# Altium PCB smartmcuPCB.PcbDoc
Units mil, origin at the board's own origin, x right, y up, seen from the top; angles counter-clockwise.
Board outline 2008 x 1900 mil, 4 copper layers (Top Layer, GND_Layer, 3.3V_Layer, Bottom Layer), stack 23.756 mil thick; 89 components, 43 nets, 257 pads, 106 vias.
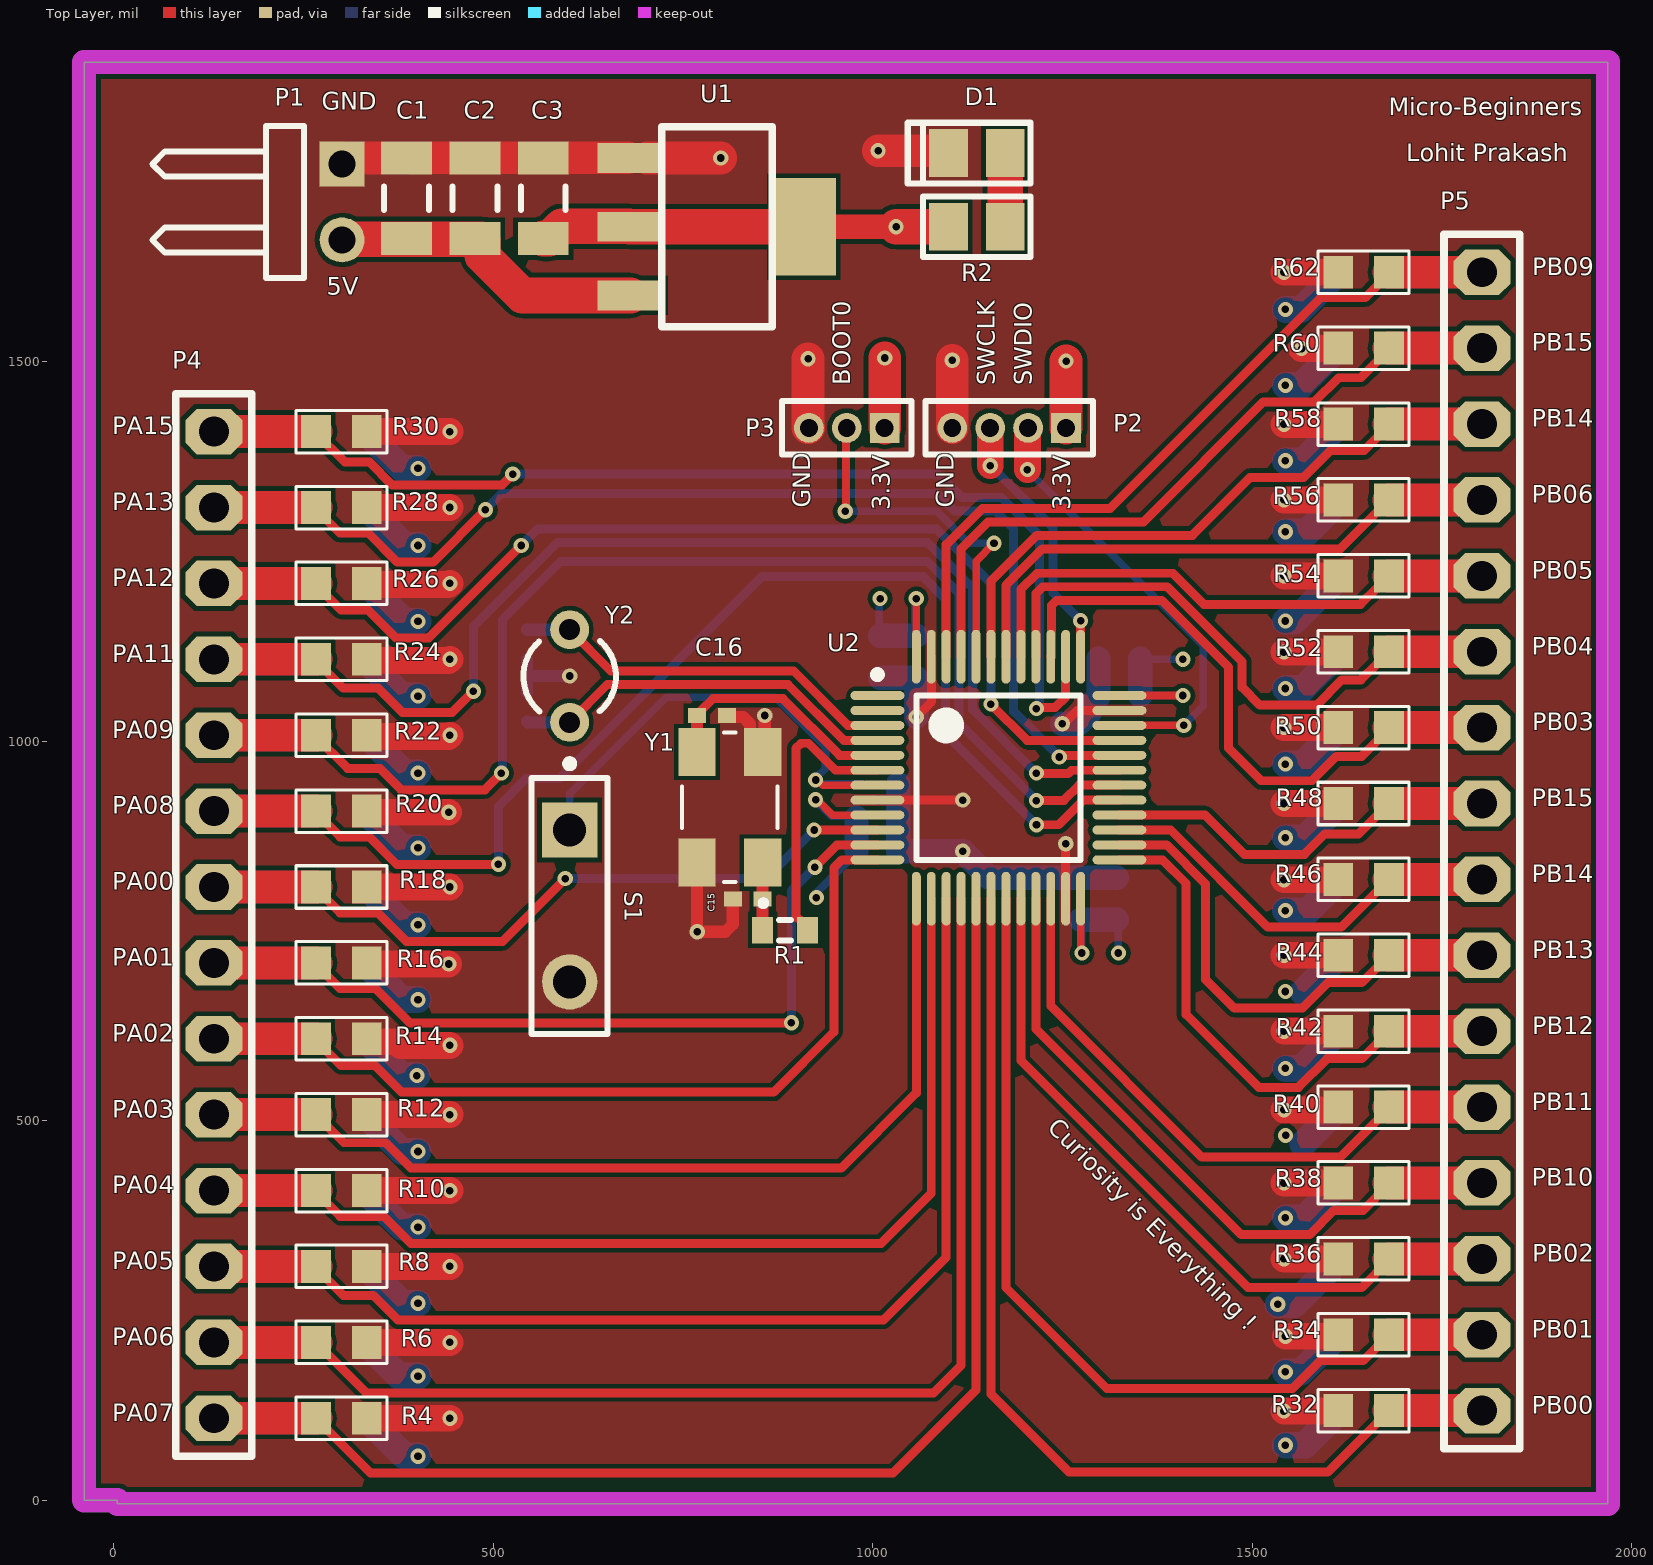
[diagram p0: Top Layer view]
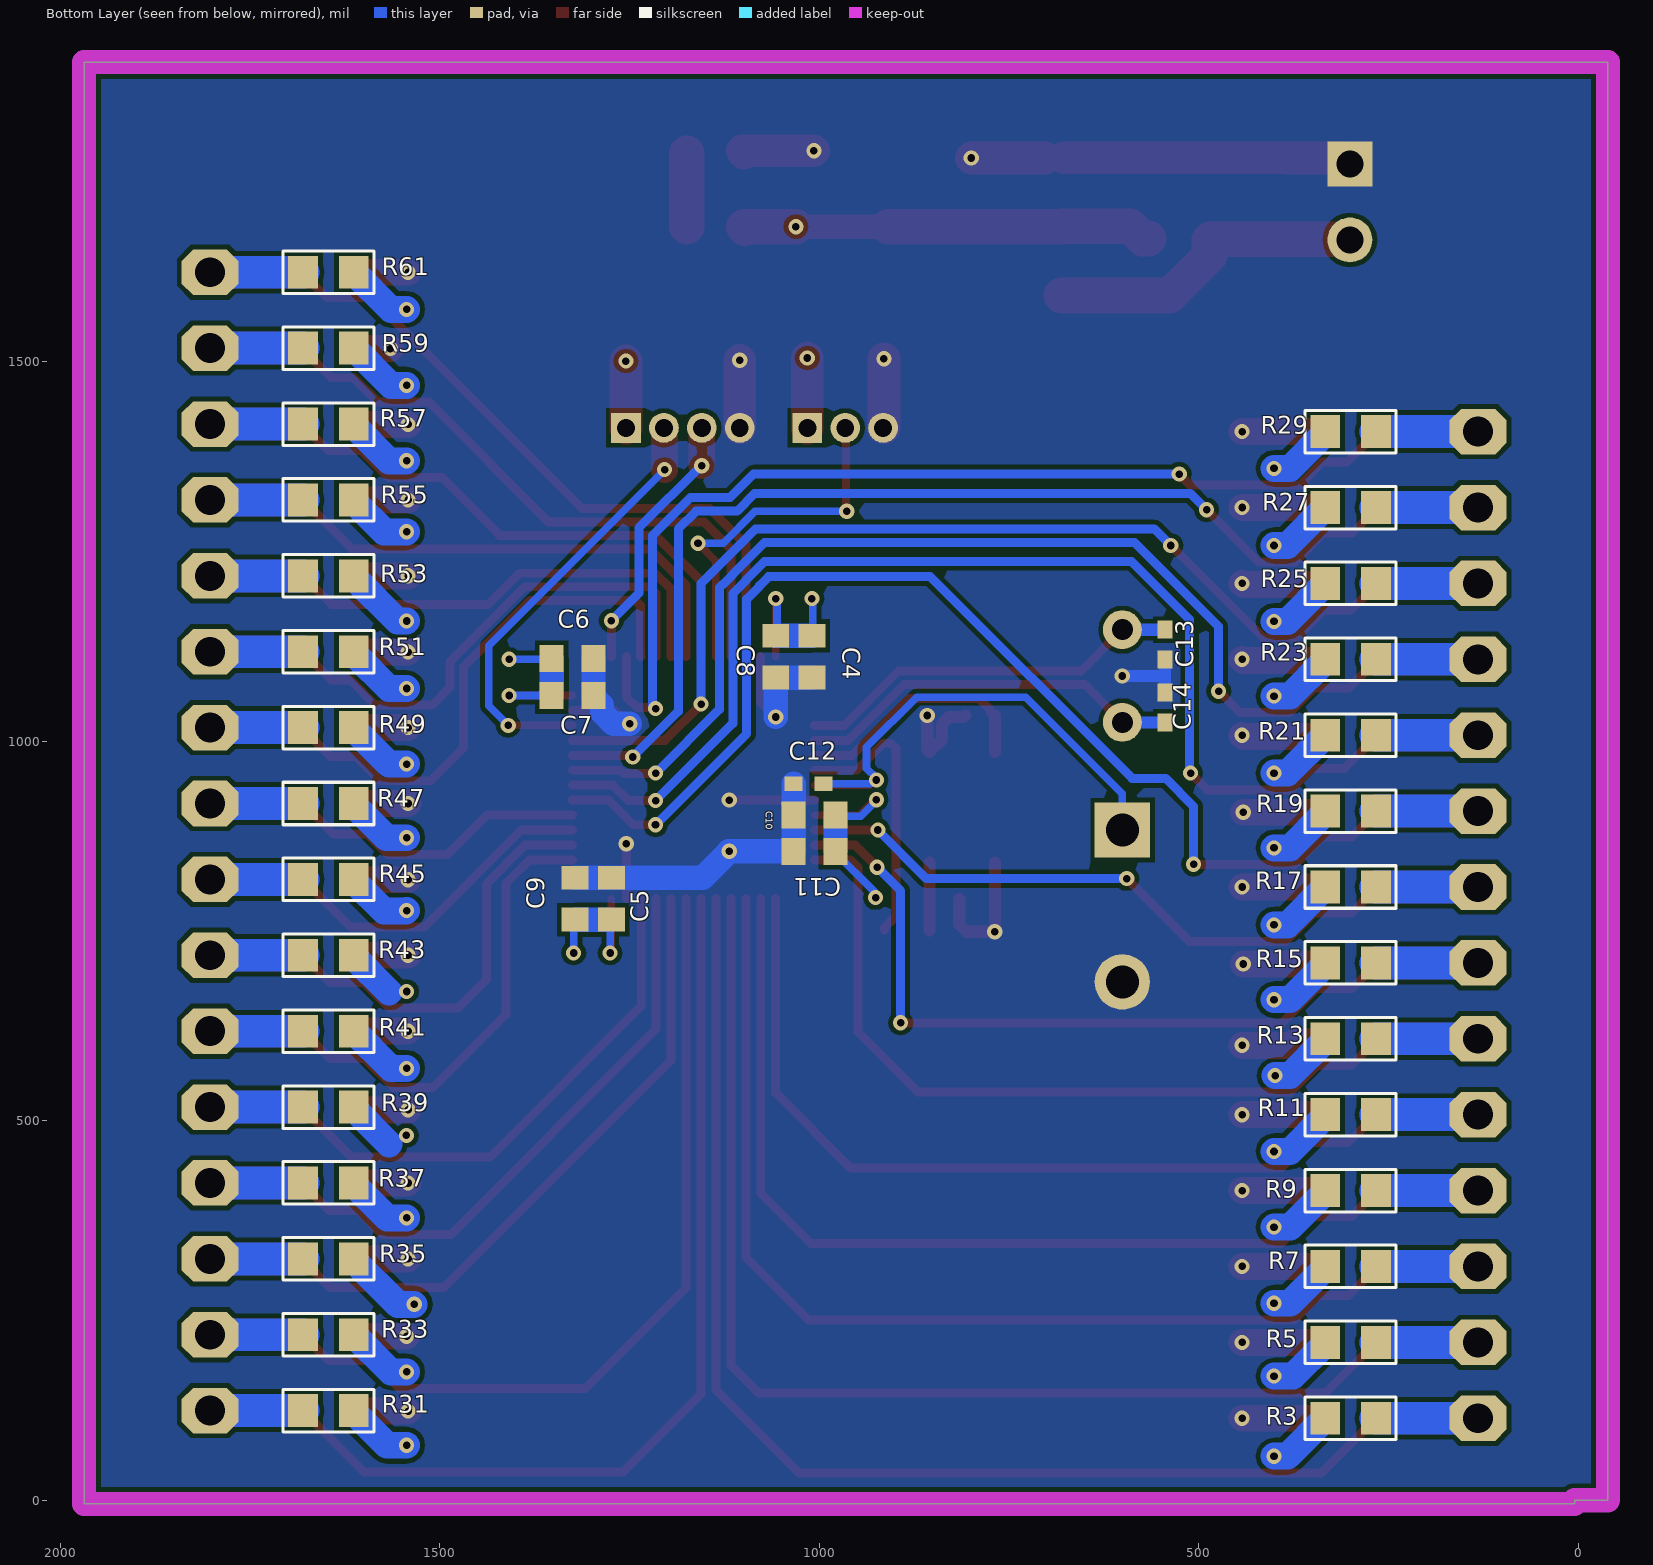
[diagram p1: Bottom Layer view, seen from below]
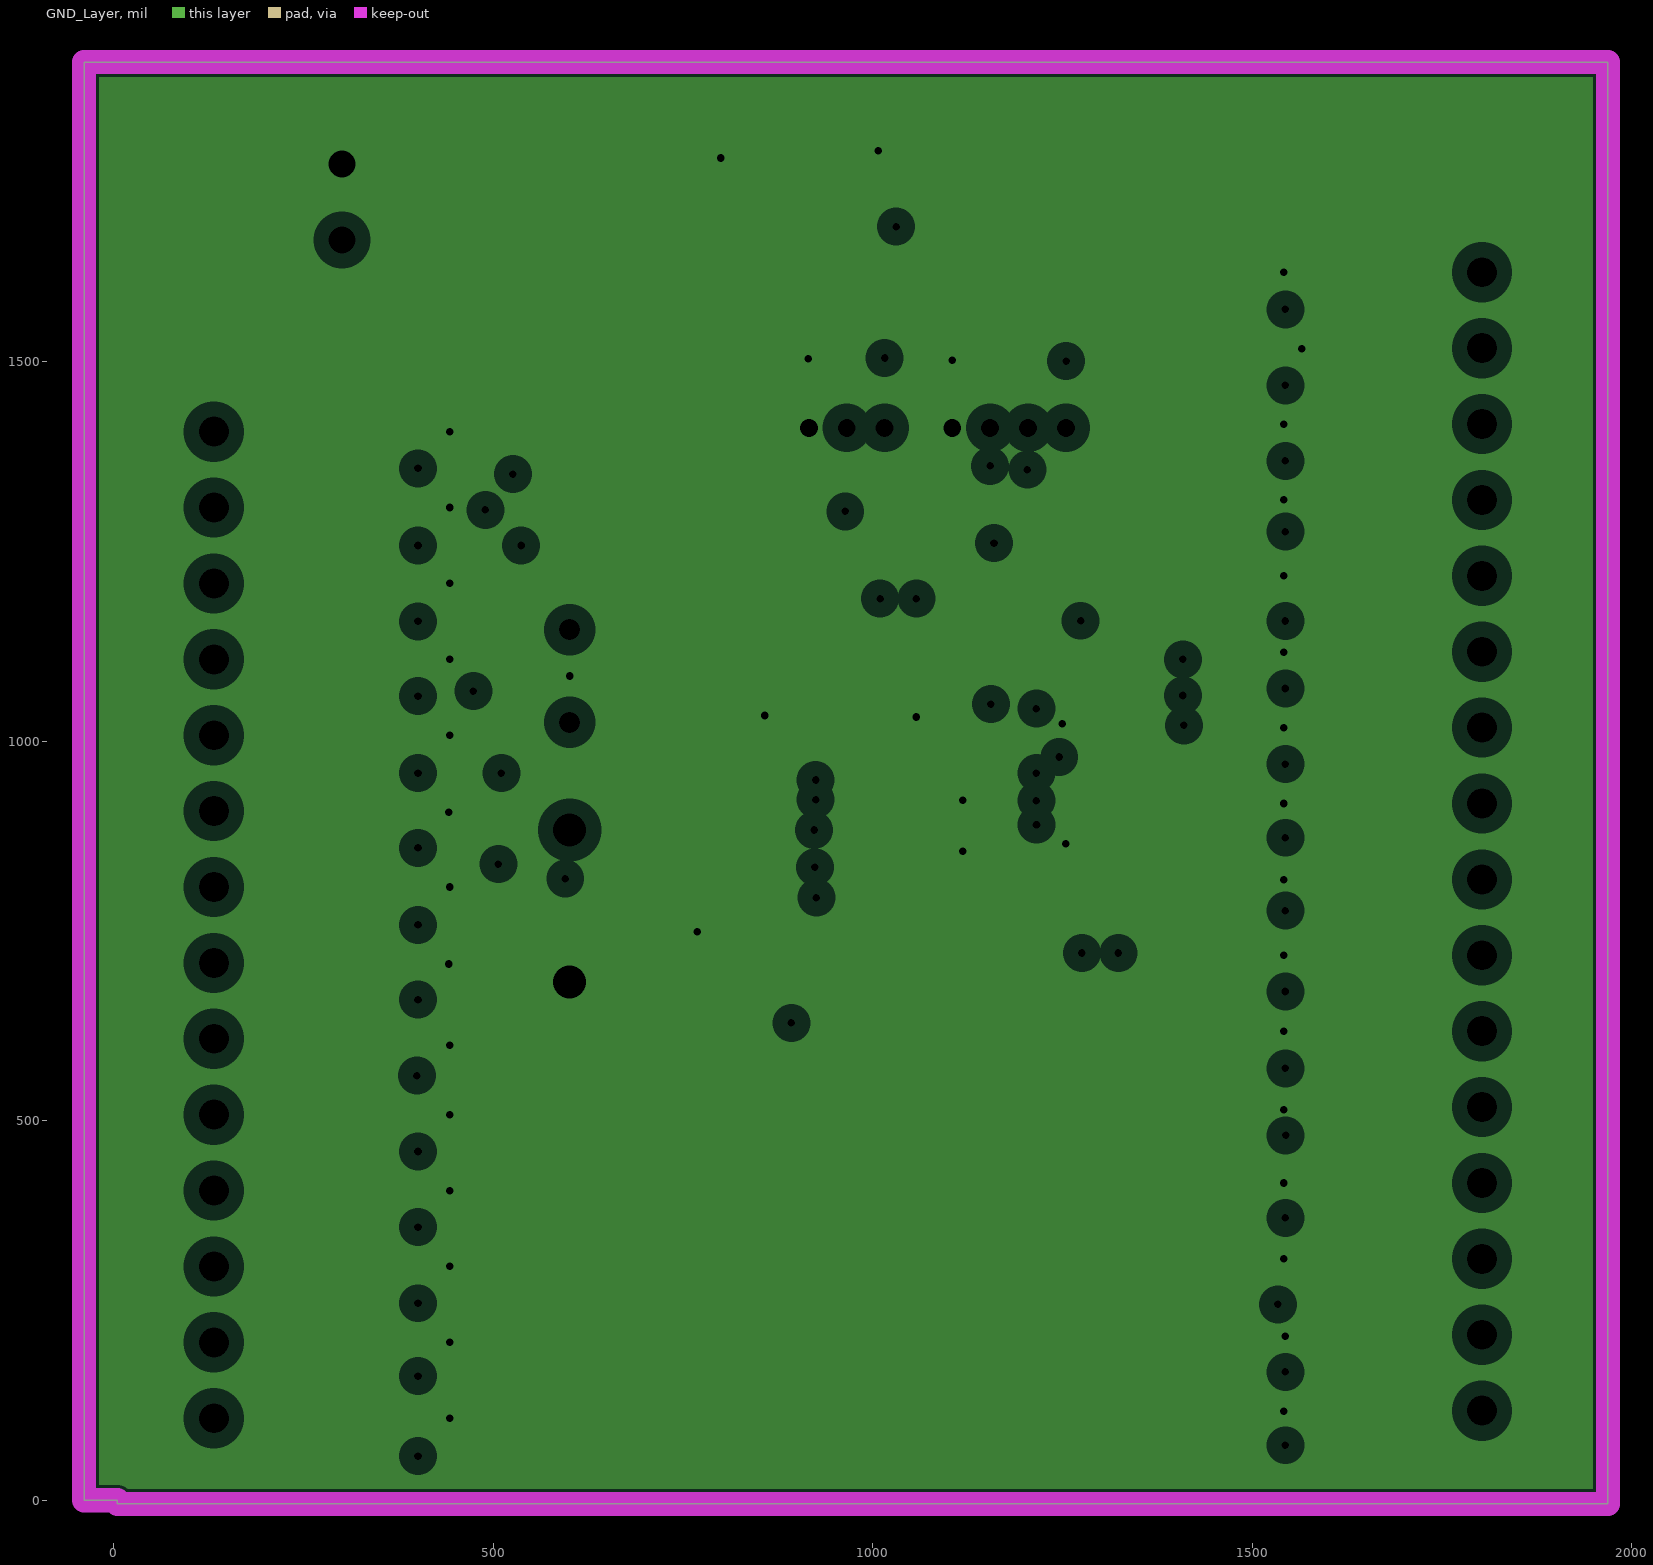
[diagram p2: GND_Layer, clearances drawn from the general rule]
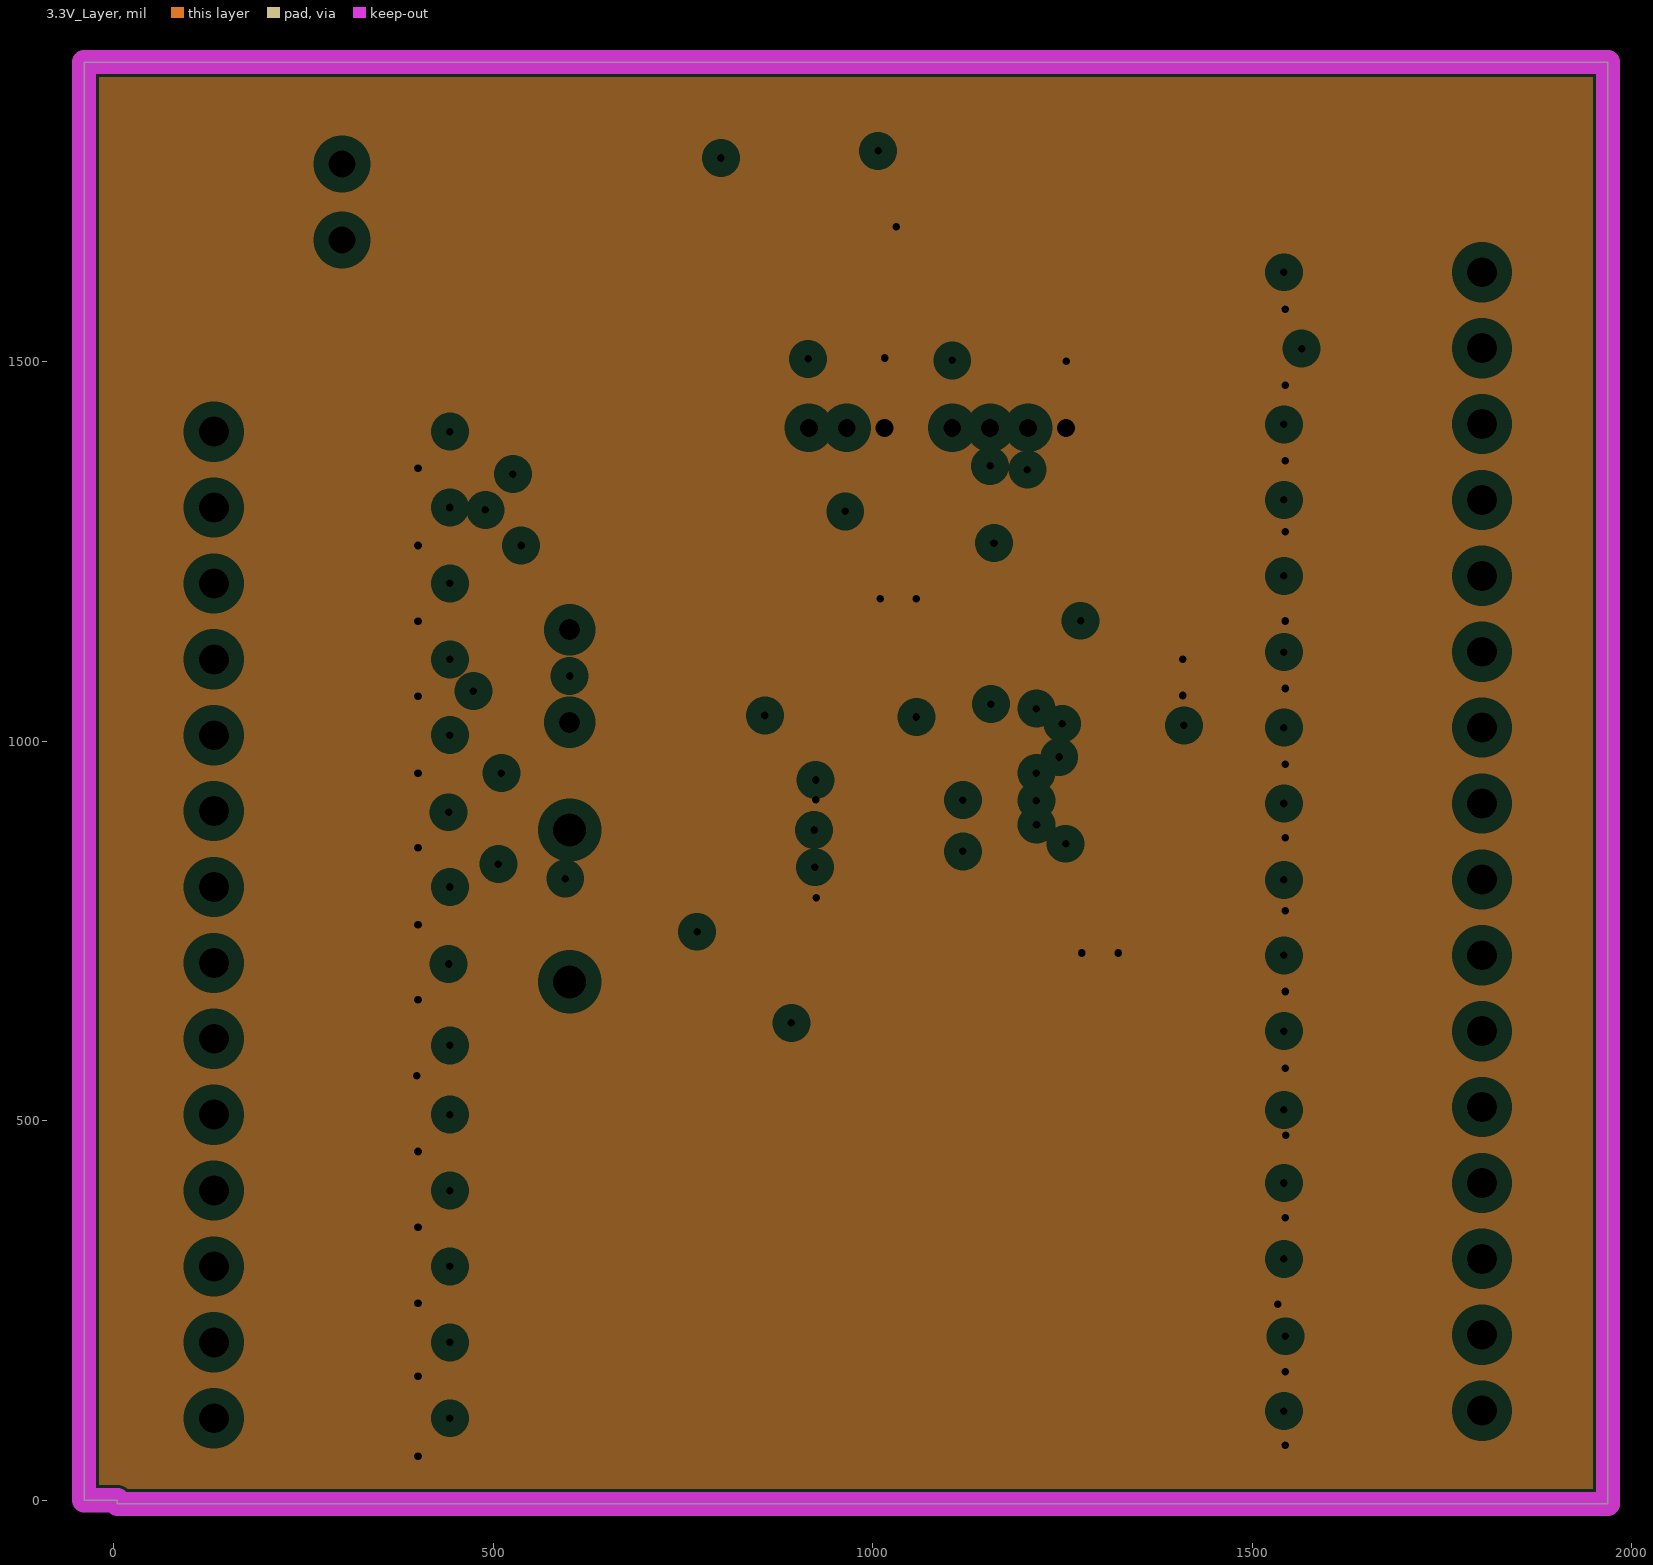
[diagram p3: 3.3V_Layer, clearances drawn from the general rule]
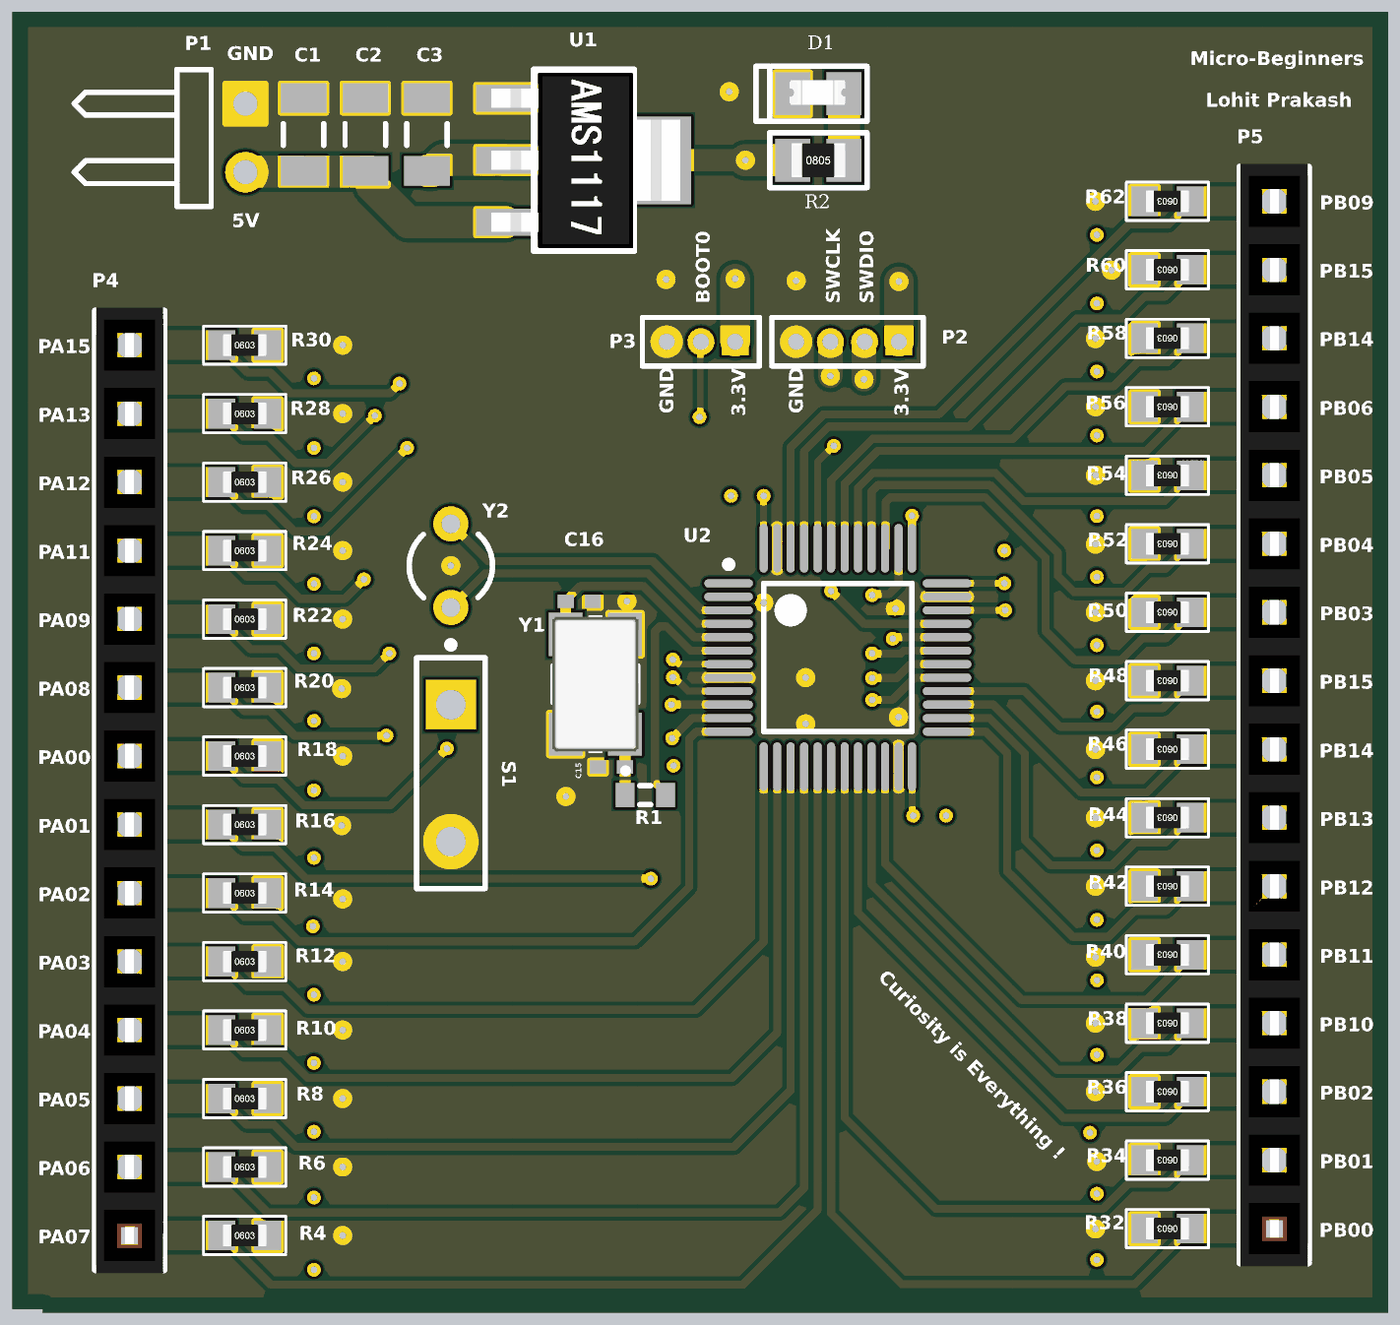
[diagram p4: 3D render of the assembled board from above, using the file's embedded part models]
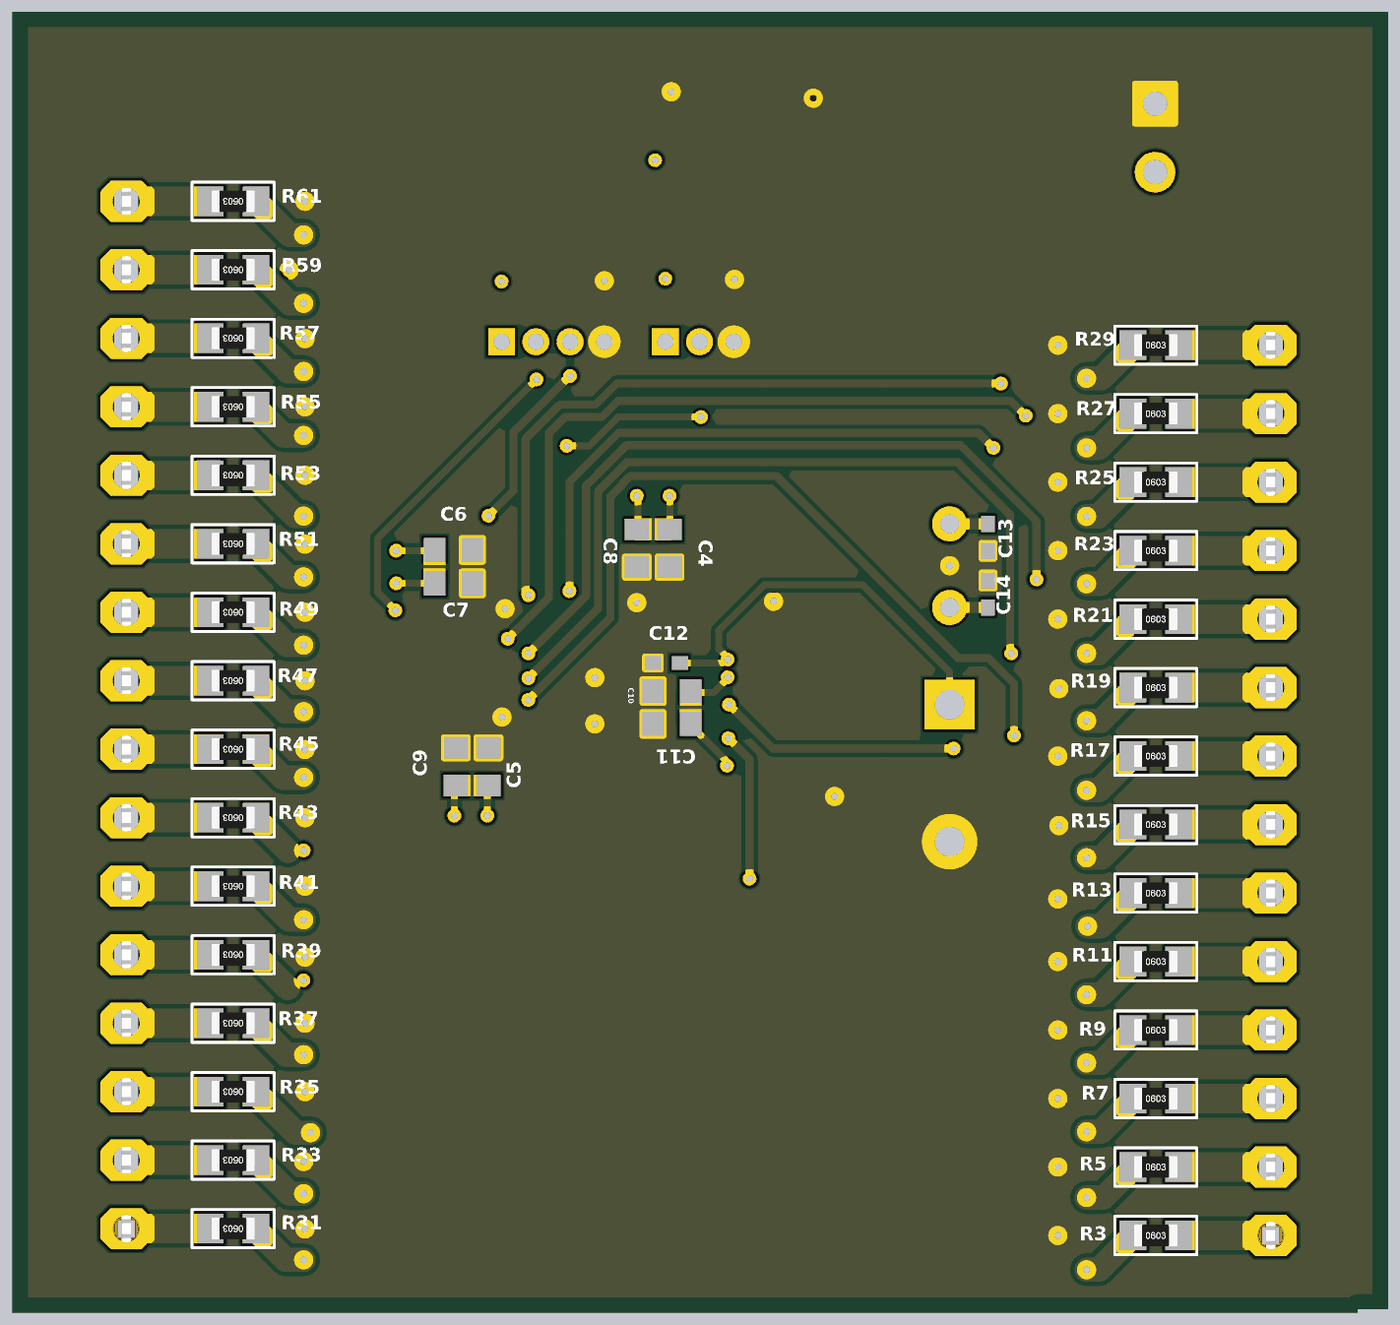
[diagram p5: 3D render of the assembled board from below, using the file's embedded part models]

## Layer stack, top to bottom
Top Solder: solder mask 0.4, Solder Resist, Dk 3.5
Top Layer: signal copper 1.4
Dielectric 2: prepreg 2.8, PP-006, Dk 4.1
GND_Layer: plane copper 1.378, net GND
Dielectric 1: dielectric 12.6, FR-4, Dk 4.8
3.3V_Layer: plane copper 1.378, net +3.3V
Dielectric 3: prepreg 2.8, PP-006, Dk 4.1
Bottom Layer: signal copper 1.4
Bottom Solder: solder mask 0.4, Solder Resist, Dk 3.5

## Board outline
-39,0 -39,1895 1969,1895 1969,-5 5,-5 5,0

## Design rules (kind name [scope] priority, off if disabled: settings)
Clearance [All] p1: gap=6 ignorepadtopadclearanceinfootprint=FALSE
MinimumSolderMaskSliver [All] p1: minsoldermaskwidth=4
PlaneClearance [All] p1: clearance=20
PlaneConnect [All] p1: planeconnectstyle=Direct reliefexpansion=20 reliefentries=4 reliefconductorwidth=10 reliefairgap=10
PolygonConnect [All] p1: connectstyle=Direct reliefconductorwidth=10 reliefentries=4 polygonreliefangle="90 Angle" airgapwidth=10
RoutingVias [All] p1: holewidth=10 width=20 viastyle="Through Hole" minholewidth=10 minwidth=20 maxholewidth=28 maxwidth=50
SilkToSolderMaskClearance [IsPad] p1: minsilkscreentomaskgap=4 clearancetoexposedcopper=TRUE
SolderMaskExpansion [All] p1: expansion=4 istentingtop=FALSE
SupplyNets "Schematic Supply Nets_2" [InNet('+3.3V')] p1: voltage=0.000
SupplyNets "Schematic Supply Nets_1" [InNet('+5V')] p2: voltage=0.000
SupplyNets "Schematic Supply Nets" [InNet('GND')] p3: voltage=0.000
Width [All] p1: maxlimit=47 minlimit=10 preferedwidth=10
26 further rules are at their usual default settings.

## Classes and differential pairs
component class MCU: C4 C5 C6 C7 C8 C9 C10 C11 C12 C13 C14 C15 C16 P2 P3 P4 P5 R1 R3 R4 R5 R6 R7 R8 R9 R10 R11 R12 R13 R14 R15 R16 R17 R18 R19 R20 R21 R22 R23 R24 R25 R26 R27 R28 R29 R30 R31 R32 R33 R34 R35 R36 R37 R38 R39 R40 R41 R42 R43 R44 R45 R46 R47 R48 R49 R50 R51 R52 R53 R54 R55 R56 R57 R58 R59 R60 R61 R62 S1 U2 Y1 Y2
component class PowerSuppy: C1 C2 C3 D1 P1 R2 U1

## Components (designator, comment, footprint, x,y, rotation, side; value= is the part's Value field where it differs from the comment)
C1 "Cap Semi" C1206 385.8,1715.56 r270 top value=100nF
C2 "Cap Semi" C1206 476,1715.56 r270 top value=10uF
C3 "Cap Semi" C1206 566,1715.56 r270 top value=100pF
C4 "Cap Semi" 1608[0603] 1009.89,1111.45 r90 bottom value=100nF
C5 "Cap Semi" 1608[0603] 1274.16,792.56 r270 bottom value=100nF
C6 "Cap Semi" 1608[0603] 1325.34,1109 r0 bottom value=100nF
C7 "Cap Semi" 1608[0603] 1325.34,1060.27 r0 bottom value=100nF
C8 "Cap Semi" 1608[0603] 1057.62,1111.45 r90 bottom value=100nF
C9 "Cap Semi" 1608[0603] 1321.89,792.56 r270 bottom value=4.7uF
C10 "Cap Semi" 1608[0603] 1006.44,902.79 r180 bottom value=10nF
C11 "Cap Semi" 1608[0603] 1006.44,855 r180 bottom value=1uF
C12 "Cap Semi" 0402 1014.32,944 r180 bottom value=8pF
C13 "Cap Semi" 0402 544.89,1127.34 r90 bottom value=8pF
C14 "Cap Semi" 0402 544.89,1044.66 r270 bottom value=8pF
C15 "Cap Semi" 0402 835.51,792 r0 top value=10pF
C16 "Cap Semi" 0402 788.27,1034 r180 top value=10pF
D1 "LED" MY_LED_0805 1137.35,1778.01 r0 top
P1 "Header 2H" HDR1X2H 301,1760.56 r270 top
P2 "MHDR1X4" MHDR1X4 1255,1413 r180 top
P3 "MHDR1X3" MHDR1X3 1016,1413 r180 top
P4 "Header 14" MY_FE14 132,758 r90 top
P5 "Header 16" MY_FE16 1803,868 r90 top
R1 "Res3" J1-0603 884.72,751 r0 top value=10R
R2 "330R" MY_0805 1137.35,1678.01 r0 top
R3 "1K" MY_0603 300,108 r180 bottom
R4 "1K" MY_0603 300,108 r0 top
R5 "1K" MY_0603 300,208 r180 bottom
R6 "1K" MY_0603 300,208 r0 top
R7 "1K" MY_0603 300,308 r180 bottom
R8 "1K" MY_0603 300,308 r0 top
R9 "1K" MY_0603 300,408 r180 bottom
R10 "1K" MY_0603 300,408 r0 top
R11 "1K" MY_0603 300,508 r180 bottom
R12 "1K" MY_0603 300,508 r0 top
R13 "1K" MY_0603 300,608 r180 bottom
R14 "1K" MY_0603 300,608 r0 top
R15 "1K" MY_0603 300,708 r180 bottom
R16 "1K" MY_0603 300,708 r0 top
R17 "1K" MY_0603 300,808 r180 bottom
R18 "1K" MY_0603 300,808 r0 top
R19 "1K" MY_0603 300,908 r180 bottom
R20 "1K" MY_0603 300,908 r0 top
R21 "1K" MY_0603 300,1008 r180 bottom
R22 "1K" MY_0603 300,1008 r0 top
R23 "1K" MY_0603 300,1108 r180 bottom
R24 "1K" MY_0603 300,1108 r0 top
R25 "1K" MY_0603 300,1208 r180 bottom
R26 "1K" MY_0603 300,1208 r0 top
R27 "1K" MY_0603 300,1308 r180 bottom
R28 "1K" MY_0603 300,1308 r0 top
R29 "1K" MY_0603 300,1408 r180 bottom
R30 "1K" MY_0603 300,1408 r0 top
R31 "1K" MY_0603 1647,118 r0 bottom
R32 "1K" MY_0603 1647,118 r180 top
R33 "1K" MY_0603 1647,218 r0 bottom
R34 "1K" MY_0603 1647,218 r180 top
R35 "1K" MY_0603 1647,318 r0 bottom
R36 "1K" MY_0603 1647,318 r180 top
R37 "1K" MY_0603 1647,418 r0 bottom
R38 "1K" MY_0603 1647,418 r180 top
R39 "1K" MY_0603 1647,518 r0 bottom
R40 "1K" MY_0603 1647,518 r180 top
R41 "1K" MY_0603 1647,618 r0 bottom
R42 "1K" MY_0603 1647,618 r180 top
R43 "1K" MY_0603 1647,718 r0 bottom
R44 "1K" MY_0603 1647,718 r180 top
R45 "1K" MY_0603 1647,818 r0 bottom
R46 "1K" MY_0603 1647,818 r180 top
R47 "1K" MY_0603 1647,918 r0 bottom
R48 "1K" MY_0603 1647,918 r180 top
R49 "1K" MY_0603 1647,1018 r0 bottom
R50 "1K" MY_0603 1647,1018 r180 top
R51 "1K" MY_0603 1647,1118 r0 bottom
R52 "1K" MY_0603 1647,1118 r180 top
R53 "1K" MY_0603 1647,1218 r0 bottom
R54 "1K" MY_0603 1647,1218 r180 top
R55 "1K" MY_0603 1647,1318 r0 bottom
R56 "1K" MY_0603 1647,1318 r180 top
R57 "1K" MY_0603 1647,1418 r0 bottom
R58 "1K" MY_0603 1647,1418 r180 top
R59 "1K" MY_0603 1647,1518 r0 bottom
R60 "1K" MY_0603 1647,1518 r180 top
R61 "1K" MY_0603 1647,1618 r0 bottom
R62 "1K" MY_0603 1647,1618 r180 top
S1 "SW-PB" SPST-2 600.89,783 r270 top
U1 "" "4-Pin SOT" 868,1678 r270 top
U2 "STM32F103C8T6" STM-LQFP48_N 1165.89,952 r0 top
Y1 "ECS-80-18-30B-JEM-TR" XTAL_ECS-80-18-30B-JEM-TR 811.89,913 r90 top
Y2 "XTAL" R38 600.89,1086 r0 top

## Footprints (in the part's own frame and the unit in brackets; to place one, negate y for a bottom-side part, rotate by r counter-clockwise, add the part's x,y. Pads: shape width x height; smd on the part's side, far side on the other; paste and mask are expansions set on the pad)
"4-Pin SOT" [mm]
  rect 1x2.2 smd: 0(2.3,-4.75) 1(-2.3,-4.75) 2(0,-4.75)
  rect 3.25x2.15 smd: 2(0,1.05)
  silkscreen extent -3.35,-3.7 3.35,0, body extent -3.25,-5.28 3.25,1.72, height 1.84
0402 [mm] "Chip Capacitor, Body 1.0x0.5mm, IPC High Density"
  rect 0.6x0.5 smd: 1(-0.5,0) 2(0.5,0)
  body extent -0.55,-0.3 0.55,0.3, height 1.3
1608[0603] [mm] "Chip Capacitor, Body 1.6x0.8mm, IPC High Density"
  rect 0.8x0.9 smd: 1(-0.7,0) 2(0.7,0)
  body extent -0.87,-0.48 0.87,0.48, height 1.3
C1206 [mm] "Chip Capacitor, Body 3.2x1.6mm, IPC High Density"
  rect 1.1x1.7 smd: 1(-1.35,0) 2(1.35,0)
  silkscreen extent -0.4,-0.75 0.4,0.75, body extent -1.7,-0.9 1.7,0.9, height 1.3
HDR1X2H [mm] "Connector; Header; 2 Position; Right Angle"
  rect 1.5x1.5 hole 0.9: 1(0,0)
  round 1.5 hole 0.9: 2(2.54,0)
  silkscreen extent -1.27,-6.35 3.81,-1.27
J1-0603 [mm] "Chip Resistor, Body 1.6x0.8mm, IPC High Density"
  rect 0.7x0.9 smd: 1(-0.75,0) 2(0.75,0)
  silkscreen extent -0.2,-0.35 0.2,0.35, body extent -0.85,-0.48 0.85,0.48, height 0.9
MHDR1X3 [mm] "Connector; Header; 3 Position"
  rect 1x1 hole 0.6: 1(0,0)
  round 1 hole 0.6: 2(1.27,0) 3(2.54,0)
  silkscreen extent -0.9,-0.9 3.44,0.9
MHDR1X4 [mm] "Connector; Header; 4 Position"
  rect 1x1 hole 0.6: 1(0,0)
  round 1 hole 0.6: 2(1.27,0) 3(2.54,0) 4(3.81,0)
  silkscreen extent -0.9,-0.9 4.71,0.9
MY_0603 [mm]
  rect 1x1.1 smd: 1(-0.85,0) 2(0.85,0)
  silkscreen extent -1.52,-0.71 1.52,0.71, body extent -0.8,-0.4 0.8,0.4, height 0.44
MY_0805 [mm]
  rect 1.3x1.6 smd: 1(-0.95,0) 2(0.95,0)
  silkscreen extent -1.8,-1.02 1.8,1.02, body extent -1,-0.62 1,0.63, height 0.59
MY_FE14 [mil]
  oct 60x75 hole 39.37: 1(-650,0) 2(-550,0) 3(-450,0) 4(-350,0) 5(-250,0) 6(-150,0) 7(-50,0) 8(50,0) 9(150,0) 10(250,0) 11(350,0) 12(450,0) 13(550,0) 14(650,0)
  silkscreen extent -700,-50 700,50, body extent -705,-49 705,49, height 335
MY_FE16 [mil]
  oct 60x75 hole 39.37: 1(-750,0) 2(-650,0) 3(-550,0) 4(-450,0) 5(-350,0) 6(-250,0) 7(-150,0) 8(-50,0) 9(50,0) 10(150,0) 11(250,0) 12(350,0) 13(450,0) 14(550,0) 15(650,0) 16(750,0)
  silkscreen extent -800,-50 800,50, body extent -805,-49 805,49, height 335
MY_LED_0805 [mm]
  rect 1.3x1.6 smd: A(0.95,-0.076) K(-0.95,-0.076)
  silkscreen extent -2.31,-1.09 1.8,0.94, body extent -1.06,-0.48 1.01,0.42, height 0.86
R38 [mm] "Crystal, Thru-Hole; 2 Leads; Body 3.1 x 8.2 mm (Dia.xH)"
  round 1.3 hole 0.7: 1(0,1.55) 2(0,-1.55)
  silkscreen extent -1.55,-1.19 1.55,1.17
SPST-2 [mm] "Switch; 2 Leads"
  rect 1.85x1.85 hole 1.1: 1(-2.54,0)
  round 1.85 hole 1.1: 2(2.54,0)
  silkscreen extent -4.89,-1.27 4.28,1.27
STM-LQFP48_N [mm] "QFP, 48-Leads, Body 7x7mm, Pitch 0.5mm, IPC Medium Density"
  oval 1.8x0.3 smd: 1(-4.05,2.75) 2(-4.05,2.25) 3(-4.05,1.75) 4(-4.05,1.25) 5(-4.05,0.75) 6(-4.05,0.25) 7(-4.05,-0.25) 8(-4.05,-0.75) 9(-4.05,-1.25) 10(-4.05,-1.75) 11(-4.05,-2.25) 12(-4.05,-2.75) 25(4.05,-2.75) 26(4.05,-2.25) 27(4.05,-1.75) 28(4.05,-1.25) 29(4.05,-0.75) 30(4.05,-0.25) 31(4.05,0.25) 32(4.05,0.75) 33(4.05,1.25) 34(4.05,1.75) 35(4.05,2.25) 36(4.05,2.75)
  oval 0.3x1.8 smd: 13(-2.75,-4.05) 14(-2.25,-4.05) 15(-1.75,-4.05) 16(-1.25,-4.05) 17(-0.75,-4.05) 18(-0.25,-4.05) 19(0.25,-4.05) 20(0.75,-4.05) 21(1.25,-4.05) 22(1.75,-4.05) 23(2.25,-4.05) 24(2.75,-4.05) 37(2.75,4.05) 38(2.25,4.05) 39(1.75,4.05) 40(1.25,4.05) 41(0.75,4.05) 42(0.25,4.05) 43(-0.25,4.05) 44(-0.75,4.05) 45(-1.25,4.05) 46(-1.75,4.05) 47(-2.25,4.05) 48(-2.75,4.05)
  silkscreen extent -4.17,-2.75 2.75,3.57, body extent -3.5,-3.5 3.5,3.5, height 1.6
XTAL_ECS-80-18-30B-JEM-TR [mm]
  rect 1.6x1.25 smd: 1(-1.85,-1.1) 2(1.85,-1.1) 3(1.85,1.1) 4(-1.85,1.1)
  silkscreen extent -3.31,-1.6 2.5,1.6, body extent -2.5,-1.6 2.5,1.6, height 0.85

## Part data
C1 C2 C3 C4 C5 C6 C7 C8 C9 C10 C11 C12 C13 C14 C15 C16: "Capacitor (Semiconductor SIM Model)", LatestRevisionDate=29-May-2009, LatestRevisionNote="IPC-7351 Footprint Added.", PackageDescription="Chip Capacitor", PackageReference=C1206, Published=8-Jun-2000, Publisher="Altium Limited"
D1: "Typical INFRARED GaAs LED", ASiD Part Number=LED-AS
P1: "Header, 2-Pin, Right Angle", LatestRevisionDate=17-Jul-2002, LatestRevisionNote="Re-released for DXP Platform.", Publisher="Altium Limited"
P2: "Header, 4-Pin", LatestRevisionDate=17-Jul-2002, LatestRevisionNote="Re-released for DXP Platform.", Publisher="Altium Limited"
P3: "Header, 3-Pin", LatestRevisionDate=17-Jul-2002, LatestRevisionNote="Re-released for DXP Platform.", Publisher="Altium Limited"
P4: "Header, 14-Pin", ASiD Part Number="Header 14-AS"
P5: "Header, 16-Pin", ASiD Part Number="Header 16-AS"
R1: "Resistor", LatestRevisionDate=29-May-2009, LatestRevisionNote="IPC-7351 Footprint Added.", PackageDescription="Chip Resistor", PackageReference=J1-0603, Published=8-Jun-2000, Publisher="Altium Limited"
R2 R3 R4 R5 R6 R7 R8 R9 R10 R11 R12 R13 R14 R15 R16 R17 R18 R19 R20 R21 R22 R23 R24 R25 R26 R27 R28 R29 R30 R31 R32 R33 R34 R35 R36 R37 R38 R39 R40 R41 R42 R43 R44 R45 R46 R47 R48 R49 R50 R51 R52 R53 R54 R55 R56 R57 R58 R59 R60 R61 R62: library part Res, "Standard resistor", ASiD Part Number=Res-AS
S1: "Switch", LatestRevisionDate=17-Jul-2002, LatestRevisionNote="Re-released for DXP Platform.", PackageDescription="Switch; 2 Leads", PackageReference=SPST-2, Published=24-Mar-1999, Publisher="Altium Limited"
U1: library part lm1117, "The LM1117 is a low dropout voltage regulator with a  / dropout of 1.2 V at 800 mA of load current. /  The LM1117 is available in an adjustable version,  / which can set the output voltage from 1.25 V to 13.8 V  / with only two external resistors. In addition, the device  / is available in five fixed voltages, 1.8 V, 2.5 V, 3.3 V,  / and 5 V. /  The LM1117 offers current limiting and thermal  / shutdown. The circuit includes a Zener trimmed band / gap reference to assure output voltage accuracy to  / within ±1%. /  A minimum of 10-µF tantalum capacitor is required  / at the output to improve the transient response and  / stability", output voltage=3.3V, ComponentLink1Description=Datasheet, ComponentLink1URL=https://www.ti.com/lit/ds/symlink/lm1117.pdf
U2: "ARM Cortex-M3 32-bit MCU, 64 KB Flash, 20 KB Internal RAM, 37 I/Os, 48-pin LQFP, -40 to 85 degC, Tray", I/Os (High Current)=37, Operating Frequency(F) (Processor speed) (MHz)=72, Supplier Part Number 1=497-6063-ND, Supply Voltage(Vcc) min (V)=2, A/D Converter="2x12-bit (10 Channel)", ComponentLink1Description="Manufacturer URL", ComponentLink1URL=http://www.st.com/web/en/home.html, ComponentLink2Description=Datasheet, ComponentLink2URL=http://www.st.com/st-web-ui/static/active/en/resource/technical/document/datasheet/CD00161566.pdf, ComponentLink3Description="Package Specification", ComponentLink3URL=http://www.st.com/st-web-ui/static/active/en/resource/technical/document/datasheet/DM00058181.pdf, Core="ARM Cortex-M3", DatasheetVersion="Rev. 16", FLASH Size (Prog) (kB)=64, Internal RAM Size (kB)=20, Mounting Technology="Surface Mount", PackageDescription="48-Pin Low Profile Quad Flat Package, 7 x 7 mm Body, 0.5 mm Pitch", PackageReference=LQFP48, PackageVersion="Rev. 6, 06/2013", Packing=Tray, PartNumber=STM32F103C8T6, Supplier 1=Digi-Key, Supplier 2=Farnell, Supplier 3=Newark, Supplier 4=Newark, Supplier 5=Mouser, Supplier Part Number 2=1447637, Supplier Part Number 3=59M2182, Supplier Part Number 4=57P1222, Supplier Part Number 5=511-STM32F103C8T6
Y1: "8 MHz Â±20ppm Crystal 18pF 100 Ohms 4-SMD, No Lead", Package="ECX-53B-30B-4 ECS", Check_prices=https://www.snapeda.com/parts/ECS-80-18-30B-JEM-TR/ECS/view-part/?ref=eda, MF="ECS Inc.", MP=ECS-80-18-30B-JEM-TR, SnapEDA_Link=https://www.snapeda.com/parts/ECS-80-18-30B-JEM-TR/ECS/view-part/?ref=snap
Y2: "Crystal Oscillator", LatestRevisionDate=17-Jul-2002, LatestRevisionNote="Re-released for DXP Platform.", PackageDescription="Crystal, Thru-Hole; 2 Leads; Body 3.1 x 8.2 mm (Dia.xH)", PackageReference=R38, Published=8-Jun-2000, Publisher="Altium Limited"

## Via types
v1: diameter 20, hole 10, Top Layer to Bottom Layer, 106 vias

## Nets (pads, with @x,y where several pads share a name; then routed paths per layer and width w, separated by ;. In a path a pad name is that pad's centre, name@x,y a point inside that pad or via, vN(x,y) a via of type N, cw(c..) or ccw(c..) an arc to the next point about the centre after c; other vN are vias at no path point)
32KHz_01: C13.2 U2.3 Y2.1 | length 513.8
  Top Layer w11.8: Y2.1 601.89,1146 655.31,1092.6 895.92,1092.6 967.62,1020.9 U2.3
  Bottom Layer w16: C13.2 Y2.1
32KHz_02: C14.2 U2.4 Y2.2 | length 514.1
  Top Layer w11.8: Y2.2 650.71,1074.8 888.55,1074.8 962.13,1001.21 U2.4
  Bottom Layer w11.8: C14.2 C14.2@544.89,1026
  Bottom Layer w16: C14.2@544.89,1026 545.91,1024.98 Y2.2
+3.3V: C3.2 C4.2 C5.2 C6.2 C7.2 C8.2 C9.2 C10.2 C11.2 P2.1 P3.1 R2.1 R3.1 R5.1 R7.1 R9.1 R11.1 R13.1 R15.1 R17.1 R19.1 R21.1 R23.1 R25.1 R27.1 R29.1 R31.1 R33.1 R35.1 R37.1 R39.1 R41.1 R43.1 R45.1 R47.1 R49.1 R51.1 R53.1 R55.1 R57.1 R59.1 R61.1 U1.2 U2.9 U2.24 U2.36 U2.48 | length 4336.9
  Top Layer w10: v1(925,923) 927,923 947.21,902.79 U2.9 ; U2.48 v1(1057.62,1188) ; U2.24 1274.5,792.2 1274.5,722.39 v1(1275.89,721) ; U2.36 v1@1410.89,1060.27
  Top Layer w32: U1.2@909.35,1678.01 v1(1031,1678.01)
  Top Layer w43.31: P3.1 v1(1016,1505) ; P2.1 v1(1255,1501)
  Top Layer w47: C3.2 574.12,1662.41 590.27,1678.56 679,1678.56 U1.2@679.55,1678.01 ; U1.2@681,1678.01 U1.2@679.55,1678.01 ; U1.2@909.35,1678.01 U1.2@679.55,1678.01 ; v1(1031,1678.01) 1097.85,1678.01 1098.35,1677.52 1098.35,1676.01 1099.95,1677.61 R2.1
  Bottom Layer w10: v1(925,923) 925,921.43 945.43,901 977.09,901 C10.2@978.88,899.21 ; v1(926,794) 927.91,795.91 927.91,802.06 978.88,853.03 C11.2 ; v1@1008.89,1188 1008.89,1140.01 C4.2 ; v1@1055.89,1188 1055.89,1140.74 C8.2 ; C5.2 1275.89,763.27 v1(1275.89,721) ; C9.2 1323.89,763 v1(1323.89,721) ; C7.2 1410.89,1060.27 v1@1409.89,1061.27 ; C6.2 1353.9,1108 v1(1408.89,1108) v1@1409.89,1107
  Bottom Layer w32: C11.2 C10.2@978.88,899.21 ; C4.2 C8.2 ; C5.2 C9.2 ; C7.2 C6.2
  Bottom Layer w35.43: R3.1 383.46,58 v1(401,58) ; R5.1 333.46,206.03 376.03,163.46 v1(401,163.46) ; R7.1 333.46,306.03 379.97,259.53 v1(401,259.53) ; R9.1 333.46,406.03 379.59,359.91 v1(401,359.91) ; R11.1 333.46,506.03 379.97,459.53 v1(401,459.53) ; R13.1 333.46,606.03 379.97,559.53 v1(399.55,559.53) ; R15.1 333.46,706.03 379.97,659.53 v1(401,659.53) ; R17.1 383.46,758 v1(401,758) ; R19.1 333.46,906.03 379.97,859.53 v1(401,859.53) ; R21.1 383.46,958 v1(401,958) ; R23.1 333.46,1106.03 379.97,1059.53 v1(401,1059.53) ; R25.1 383.46,1158 v1(401,1158) ; R27.1 383.46,1258 v1(401,1258) ; R29.1 333.46,1406.03 379.97,1359.53 v1(401,1359.53) ; v1(1534.01,258.09) 1555.6,258.09 1613.54,316.03 R35.1 ; v1(1544,72.44) 1569.94,72.44 1613.54,116.03 R31.1 ; v1(1544,169) 1564.54,169 R33.1 ; v1(1544,371.91) 1569.41,371.91 1611.57,414.06 1611.57,416.03 R37.1 ; v1(1544,569) 1564.54,569 R41.1 ; v1(1544,776.91) 1544.53,776.38 1573.88,776.38 1611.57,814.06 1611.57,816.03 R45.1 ; v1(1544,872.91) 1570.41,872.91 1613.54,916.03 R47.1 ; v1(1544,969.92) 1567.42,969.92 1613.54,1016.03 R49.1 ; v1(1544,1069.53) 1567.03,1069.53 1611.57,1114.06 1611.57,1116.03 R51.1 ; v1(1544,1158.43) 1555.93,1158.43 1611.57,1214.06 1611.57,1216.03 R53.1 ; v1(1544,1276.14) 1544.15,1276 1573.5,1276 1611.57,1314.06 1611.57,1316.03 R55.1 ; v1(1544,1369.53) 1567.03,1369.53 1613.54,1416.03 R57.1 ; v1(1544,1469) 1564.54,1469 R59.1 ; v1(1544,1569) 1564.54,1569 R61.1 ; 1567.03,469.53 R39.1@1613.54,516.03 ; 1567.03,669.53 R43.1@1613.54,716.03
  other v1: 1544.24,480.66 1544,670.35 1408.89,1060.27 1009.89,1188
+5V: C1.2 C2.2 P1.2 U1.0 | length 423.1
  Top Layer w47: P1.2 301.93,1661.48 485.04,1661.48 485.96,1660.56 485.96,1639.95 538.46,1587.46 U1.0@681,1587.46
BOOT0: P3.2 U2.44 | length 481.6
  Top Layer w10: v1(964,1303) 965,1304 965,1410 P3.2@966,1411 ; U2.44 1136.36,1237.36 v1(1160,1261)
  Bottom Layer w10: v1(964,1303) 1084.91,1303 1126.91,1261 v1(1160,1261)
GND: C1.1 C2.1 C3.1 C4.1 C5.1 C6.1 C7.1 C8.1 C9.1 C10.1 C11.1 C12.1 C13.1 C14.1 C15.1 C16.1 D1.K P1.1 P2.4 P3.3 R4.2 R6.2 R8.2 R10.2 R12.2 R14.2 R16.2 R18.2 R20.2 R22.2 R24.2 R26.2 R28.2 R30.2 R32.2 R34.2 R36.2 R38.2 R40.2 R42.2 R44.2 R46.2 R48.2 R50.2 R52.2 R54.2 R56.2 R58.2 R60.2 R62.2 S1.2 U1.1 U2.8 U2.23 U2.35 U2.47 Y1.2 Y1.4 | length 4790.7
  Top Layer w11.8: U2.8 v1(1118.89,922.47) ; v1(1057.62,1032) 1077.89,1052.27 1077.89,1111 1077.44,1111.45 U2.47 ; v1(1249.91,1023.12) 1252.13,1023.12 1269.59,1040.58 U2.35 ; U2.23 v1(1254.47,865)
  Top Layer w16: Y1.4 768.89,839.86 v1(768.89,749) 769.66,748.23 770.42,749 805.89,749 815.83,758.94 C15.1 ; C16.1 809.8,1032.16 829.22,1032.16 838.59,1022.78 838.59,1002.44 Y1.2 858,988.64 v1(858,1034)
  Top Layer w35.43: R4.2 v1(443,108) ; R6.2 v1(443,208) ; R8.2 v1(443,308) ; R10.2 v1(443,408) ; R12.2 v1(443,508) ; R14.2 333.46,606.03 335.43,604.06 373.05,604.06 377.73,599.38 v1(443,599.38) ; R16.2 334.99,706.47 v1(441.47,706.47) ; R18.2 v1(443,808) ; R20.2 334.99,906.47 v1(441.47,906.47) ; R22.2 334.99,1006.47 441.47,1006.47 v1(443,1008) ; R24.2 334.99,1106.47 441.47,1106.47 v1(443,1108) ; R26.2 334.99,1206.47 441.47,1206.47 v1(443,1208) ; R28.2 v1(443,1308) ; R30.2 v1(443,1408) ; v1(1542,117.47) 1613.01,117.47 R32.2 ; v1(1542,318) R36.2 ; v1(1542,418) R38.2 ; v1(1542,514.38) 1611.57,514.38 1613.54,516.35 R40.2 ; v1(1542,618) R42.2 ; v1(1542,718) R44.2 ; v1(1542,817.47) 1613.01,817.47 R46.2 ; v1(1542,918) R48.2 ; v1(1542,1018) R50.2 ; v1(1542,1117.47) 1613.01,1117.47 R52.2 ; v1(1542,1218) R54.2 ; v1(1542,1318) R56.2 ; v1(1542,1417.47) 1613.01,1417.47 R58.2 ; v1(1542,1618) R62.2 ; v1(1543.95,216.05) 1611.59,216.05 R34.2 ; v1(1565.33,1517.48) 1613.02,1517.48 R60.2
  Top Layer w43: P1.1 309,1768.56 385.64,1768.56 C1.1 C2.1 C3.1 U1.1@677.85,1768.71 ; U1.1@702.81,1768.56 v1(800,1768.56) ; v1(915,1504) 915,1413 P3.3 ; v1(1007.35,1778.01) 1101.35,1778.01 1099.95,1776.61 D1.K ; P2.4 v1(1105,1502)
  Bottom Layer w16: C14.1 544.89,1086 ; C13.1 544.89,1086 ; v1@601.89,1086 544.89,1086
  Bottom Layer w32: C4.1 C8.1 v1(1057.62,1032) ; C12.1 C10.1 C11.1 v1(1118.89,855) ; v1@1119.89,855 v1(1118.89,855) ; v1(1249.91,1023.12) 1271.48,1023.12 1286.55,1038.19 1286.55,1047.57 1297.78,1058.8 C6.1 ; C9.1 C5.1 1153.77,820.12 v1(1118.89,855)
  other v1: 600.89,1086
IN/OUT: C15.2 R1.1 Y1.1 | length 89.2
  Top Layer w16: R1.1 C15.2 Y1.1
NetD1_A: D1.A R2.2 | length 97
  Top Layer w47: R2.2 D1.A
NetR1_2: R1.2 U2.6 | length 371.4
  Top Layer w11.8: R1.2 914.25,754.94 906.37,762.82 905.8,762.82 898.89,769.73 898.89,990.51 905.8,997.42 915.58,997.42 951.16,961.84 U2.6
NRST: C12.2 S1.1 U2.7 | length 661.3
  Top Layer w10: v1(925,949) 927.71,949 934.55,942.16 U2.7
  Bottom Layer w10: S1.1 600.89,930.68 728.21,1058 871.89,1058 938,991.89 938,964.71 925,951.71 v1(925,949) 927.71,949 932.71,944 C12.2@986.76,944
OUT/IN: C16.2 U2.5 Y1.3 | length 328.8
  Top Layer w11.8: C16.2 770.55,1034 774.49,1037.94 774.49,1040.99 789.76,1056.26 881.92,1056.26 956.65,981.53 U2.5
  Top Layer w16: Y1.3 768.58,1008.31 767.89,1009 768.25,1009 768.58,1009.33 C16.2
PA0: P4.8 R17.2 R18.1 U2.10 | length 1103
  Top Layer w11.81: R18.1 266.54,806.03 298.57,774 348.15,774 386.05,736.09 512.09,736.09 v1(595.1,819.1) ; v1@924.57,881.54 v1(923,883.1) U2.10
  Top Layer w43.31: P4.8 R18.1
  Bottom Layer w11.81: v1(595.1,819.1) 859,819.1 v1(923,883.1)
  Bottom Layer w43.31: P4.8 R17.2
PA1: P4.7 R15.2 R16.1 U2.11 | length 1241.9
  Top Layer w11.81: R16.1 266.54,706.03 298.13,674.44 344.56,674.44 390,629 v1(893,629) ; v1(924,834) 953.42,863.42 U2.11
  Top Layer w43.31: P4.7 R16.1
  Bottom Layer w11.81: v1(893,629) 893,803 v1(924,834)
  Bottom Layer w43.31: P4.7 R15.2
PA2: P4.6 R13.2 R14.1 U2.12 | length 1292.7
  Top Layer w11.81: R14.1 266.54,606.03 299.57,573 344,573 379.38,537.62 869.62,537.62 948.93,616.93 948.93,833.07 959.6,843.73 U2.12
  Top Layer w43.31: P4.6 R14.1
  Bottom Layer w43.31: P4.6 R13.2
PA3: P4.5 R11.2 R12.1 U2.13 | length 1387.4
  Top Layer w11.81: R12.1 266.54,506.03 280.31,492.25 282.28,492.25 303.54,471 358.55,471 391.93,437.62 958.62,437.62 1057.62,536.62 U2.13
  Top Layer w43.31: P4.5 R12.1
  Bottom Layer w43.31: P4.5 R11.2
PA4: P4.4 R9.2 R10.1 U2.14 | length 1525.7
  Top Layer w11.81: R10.1 266.54,406.03 298.57,374 355.93,374 391.93,338 1011,338 1077.31,404.31 U2.14
  Top Layer w43.31: P4.4 R10.1
  Bottom Layer w43.31: P4.4 R9.2
PA5: P4.3 R7.2 R8.1 U2.15 | length 1636.5
  Top Layer w11.81: R8.1 266.54,306.03 302.57,270 342,270 374.38,237.62 1014.62,237.62 1096.99,319.99 U2.15
  Top Layer w43.31: P4.3 R8.1
  Bottom Layer w43.31: P4.3 R7.2
PA6: P4.2 R5.2 R6.1 U2.16 | length 1777.7
  Top Layer w11.81: R6.1 266.54,206.03 280.31,192.25 282.28,192.25 332.98,141.56 1080.56,141.56 1116.68,177.68 U2.16
  Top Layer w43.31: P4.2 R6.1
  Bottom Layer w43.31: P4.2 R5.2
PA7: P4.1 R3.2 R4.1 U2.17 | length 1862.3
  Top Layer w11.81: R4.1 266.54,106.03 280.31,92.25 282.28,92.25 338.44,36.09 1027.09,36.09 1136.36,145.36 U2.17
  Top Layer w43.31: P4.1 R4.1
  Bottom Layer w43.31: P4.1 R3.2
PA8: P4.9 R19.2 R20.1 U2.29 | length 1813
  Top Layer w11.81: R20.1 266.54,906.03 298.57,874 337,874 373.38,837.62 506.62,837.62 v1(507,838) ; v1(1216,890) 1245.22,890 1277.69,922.47 U2.29
  Top Layer w43.31: P4.9 R20.1
  Bottom Layer w11.81: v1(507,838) 507,914 544,951 588,951 854,1217 1067,1217 1078.83,1205.17 1078.83,1204.53 1096,1187.37 1096,1010 v1(1216,890)
  Bottom Layer w43.31: P4.9 R19.2
PA9: P4.10 R21.2 R22.1 U2.30 | length 1841.6
  Top Layer w11.81: R22.1 266.54,1006.03 308.39,964.17 350.83,964.17 378.91,936.09 489.09,936.09 v1(511,958) ; v1(1215.91,921.81) 1216.09,922 1252.03,922 1272.19,942.16 U2.30
  Top Layer w43.31: P4.10 R22.1
  Bottom Layer w11.81: v1(511,958) 512.57,959.57 512.57,1160.57 589,1237 1072.19,1237 1096.65,1212.54 1096.65,1211.91 1114,1194.56 1114,1023.72 1214.19,923.53 1214.19,921.81 v1(1215.91,921.81)
  Bottom Layer w43.31: P4.10 R21.2
PA10: P4.11 R23.2 R24.1 U2.31 | length 1720.2
  Top Layer w11.81: R24.1 266.54,1106.03 302.57,1070 348.5,1070 380.88,1037.62 445.62,1037.62 v1(474,1066) ; v1@1219,958 1219.6,957.4 1257.84,957.4 1262.28,961.84 U2.31
  Top Layer w43.31: P4.11 R24.1
  Bottom Layer w11.81: v1(474,1066) 474,1151 585,1262 1072.38,1262 1114.46,1219.92 1114.46,1219.29 1127.29,1206.46 1127.92,1206.46 1131.81,1202.57 1131.81,1042.09 v1(1215.9,958)
  Bottom Layer w43.31: P4.11 R23.2
PA11: P4.13 R27.2 R28.1 U2.32 | length 1681.9
  Top Layer w11.81: R28.1 266.54,1306.03 298.13,1274.44 335.56,1274.44 373.91,1236.09 420.99,1236.09 v1(489.89,1305) ; v1(1246,979.31) 1248.22,979.31 1250.44,981.53 U2.32
  Top Layer w43.31: P4.13 R28.1
  Bottom Layer w11.81: v1(489.89,1305) 511.44,1326.55 1085.27,1326.55 1108.53,1303.28 1162.53,1303.28 1186,1279.81 1186,1039.31 v1(1246,979.31)
  Bottom Layer w43.31: P4.13 R27.2
PA12: P4.12 R25.2 R26.1 U2.33 | length 1628.3
  Top Layer w11.81: R26.1 266.54,1206.03 299.57,1173 335,1173 371.91,1136.09 415.09,1136.09 v1(537,1258) ; v1(1156,1049) 1203.79,1001.21 U2.33
  Top Layer w43.31: P4.12 R26.1
  Bottom Layer w11.81: v1(537,1258) 558.81,1279.81 1084.19,1279.81 1156,1208 1156,1050 1157,1049 v1(1156,1049)
  Bottom Layer w43.31: P4.12 R25.2
PA15: P4.14 R29.2 R30.1 U2.38 | length 1614.3
  Top Layer w11.81: R30.1 266.54,1406.03 304.57,1368 337,1368 367.38,1337.62 461.3,1337.62 511.62,1337.62 v1(526,1352) ; v1@1220,1043 1221.57,1044.57 1240.74,1044.57 1254.47,1058.3 U2.38
  Top Layer w43.31: P4.14 R30.1
  Bottom Layer w11.81: v1(526,1352) 1087,1352 1117.91,1321.09 1169.91,1321.09 1220,1271 v1@1220,1043
  Bottom Layer w43.31: P4.14 R29.2
  other v1: 1215.9,1043
PB0: P5.1 R31.2 R32.1 U2.18 | length 1499.4
  Top Layer w11.81: U2.18 1156.05,139.95 1259,37 1599.46,37 1664.72,102.25 1666.69,102.25 1680.46,116.03 R32.1
  Top Layer w43.31: R32.1 P5.1
  Bottom Layer w43.31: R31.2 P5.1
PB1: P5.2 R33.2 R34.1 U2.19 | length 1347.8
  Top Layer w11.81: U2.19 1175.73,280.27 1308.91,147.09 1553.07,147.09 1589.98,184 1646.46,184 1664.72,202.25 1666.69,202.25 1680.46,216.03 R34.1
  Top Layer w43.31: R34.1 P5.2
  Bottom Layer w43.31: R33.2 P5.2
PB2: P5.3 R35.2 R36.1 U2.20 | length 1084.1
  Top Layer w11.81: U2.20 1195.42,579.58 1495,280 1617.16,280 1644.43,280 1680.46,316.03 R36.1
  Top Layer w43.31: R36.1 P5.3
  Bottom Layer w43.31: R35.2 P5.3
PB3: P5.10 R49.2 R50.1 U2.39 | length 952.1
  Top Layer w11.81: U2.39 1235.55,1111.45 1235.55,1178.88 1242.47,1185.8 1380.83,1185.8 1469.19,1097.43 1469.19,990.81 1511.99,948.01 1579.01,948.01 1611,980 1644.43,980 1680.46,1016.03 R50.1
  Top Layer w43.31: R50.1 P5.10
  Bottom Layer w43.31: R49.2 P5.10
PB4: P5.11 R51.2 R52.1 U2.40 | length 912
  Top Layer w11.81: U2.40 1215.1,1194.53 1224.18,1203.61 1388.21,1203.61 1487,1104.81 1487,1071 1510.38,1047.62 1584.98,1047.62 1618.36,1081 1643.46,1081 1664.72,1102.25 1666.69,1102.25 1680.46,1116.03 R52.1
  Top Layer w43.31: R52.1 P5.11
  Bottom Layer w43.31: R51.2 P5.11
PB5: P5.12 R53.2 R54.1 U2.41 | length 861.3
  Top Layer w11.81: U2.41 1195.42,1200.03 1216.8,1221.42 1395.58,1221.42 1436.67,1180.33 1642.8,1180.33 1664.72,1202.25 1666.69,1202.25 1680.46,1216.03 R54.1
  Top Layer w43.31: R54.1 P5.12
  Bottom Layer w43.31: R53.2 P5.12
PB6: P5.13 R55.2 R56.1 U2.42 | length 891.6
  Top Layer w11.81: U2.42 1175.73,1205.53 1223.77,1253.57 1616.03,1253.57 1664.72,1302.25 1666.69,1302.25 1680.46,1316.03 R56.1
  Top Layer w43.31: R56.1 P5.13
  Bottom Layer w43.31: R55.2 P5.13
PB7: P5.14 R57.2 R58.1 U2.43 | length 956
  Top Layer w11.81: U2.43 1156.05,1211.04 1216.39,1271.38 1421.38,1271.38 1497.62,1347.62 1567.95,1347.62 1603.33,1383 1647.43,1383 1680.46,1416.03 R58.1
  Top Layer w43.31: R58.1 P5.14
  Bottom Layer w43.31: R57.2 P5.14
PB8: P5.15 R59.2 R60.1 U2.45 | length 1061.6
  Top Layer w11.81: U2.45 1116.68,1253.49 1152.38,1289.19 1357.19,1289.19 1515.09,1447.09 1582.09,1447.09 1614,1479 1643.43,1479 1680.46,1516.03 R60.1
  Top Layer w43.31: R60.1 P5.15
  Bottom Layer w43.31: R59.2 P5.15
PB9: P5.16 R61.2 R62.1 U2.46 | length 1126
  Top Layer w11.81: U2.46 1096.99,1258.99 1145,1307 1312.98,1307 1535.71,1529.73 1553.06,1547.1 ; 1553.08,1547.1 1590.42,1584.44 1648.87,1584.44 1680.46,1616.03 R62.1
  Top Layer w43.31: R62.1 P5.16
  Bottom Layer w43.31: R61.2 P5.16
PB10: P5.4 R37.2 R38.1 U2.21 | length 1023.6
  Top Layer w11.81: U2.21 1215.1,620.9 1486,350 1576,350 1608,382 1646.43,382 1680.46,416.03 R38.1
  Top Layer w43.31: R38.1 P5.4
  Bottom Layer w43.31: R37.2 P5.4
PB11: P5.5 R39.2 R40.1 U2.22 | length 943.1
  Top Layer w11.81: U2.22 1234.79,651.21 1434,452 1616.43,452 1680.46,516.03 R40.1
  Top Layer w43.31: R40.1 P5.5
  Bottom Layer w43.31: R39.2 P5.5
PB12: P5.6 R41.2 R42.1 U2.25 | length 857.3
  Top Layer w11.81: U2.25 1381.89,843.73 1413,812.62 1413,640 1509,544 1561,544 1599,582 1644.46,582 1664.72,602.25 1666.69,602.25 1680.46,616.03 R42.1
  Top Layer w43.31: R42.1 P5.6
  Bottom Layer w43.31: R41.2 P5.6
PB13: P5.7 R43.2 R44.1 U2.26 | length 792.9
  Top Layer w11.81: U2.26 1387.39,863.42 1439,811.81 1439,686 1476.56,648.44 1566.44,648.44 1600,682 1644.46,682 1664.72,702.25 1666.69,702.25 1680.46,716.03 R44.1
  Top Layer w43.31: R44.1 P5.7
  Bottom Layer w43.31: R43.2 P5.7
PB14: P5.8 R45.2 R46.1 U2.27 | length 680.5
  Top Layer w11.81: U2.27 1392.9,883.1 1521,755 1617.46,755 1664.72,802.25 1666.69,802.25 1680.46,816.03 R46.1
  Top Layer w43.31: R46.1 P5.8
  Bottom Layer w43.31: R45.2 P5.8
PB15: P5.9 R47.2 R48.1 U2.28 | length 649.4
  Top Layer w11.81: U2.28 1438.21,902.79 1490,851 1569,851 1596,878 1640.46,878 R48.1
  Top Layer w43.31: R48.1 P5.9
  Bottom Layer w43.31: R47.2 P5.9
SWCLK: P2.3 U2.37 | length 351.5
  Top Layer w11.8: U2.37 v1(1274.16,1158.84)
  Top Layer w35.43: v1(1155,1363) P2.3
  Bottom Layer w11.8: v1(1155,1363) 1156,1363 1237.81,1281.19 1237.81,1195.19 v1(1274.16,1158.84)
SWDIO: P2.2 U2.34 | length 589.9
  Top Layer w10: P2.2 P2.2@1206.5,1411.5 ; U2.34 v1(1410.1,1020.9)
  Top Layer w35.43: v1(1204,1358) 1204,1409 1204.25,1409.25 1204.25,1411.18 1204.78,1411.71 P2.2@1206.29,1411.71
  Bottom Layer w10: v1(1204,1358) 1436,1126 1436,1046.8 v1(1410.1,1020.9) ; P2.2 P2.2@1207.53,1410.47
pads on no net: U2.1 U2.2

## Polygon pours and split planes (outlines as drawn)
GND on Bottom Layer "GND_L04_P001" (solid, remove dead copper, pour order 1): -39,0 -39,1895 1969,1895 1969,-5 5,-5 5,0
GND on Top Layer "GND_L01_P000" (solid, remove dead copper, pour order 0): -39,0 -39,1895 1969,1895 1969,-5 5,-5 5,0
GND on GND_Layer (split plane): 1948.9,15.1 18.13,15.1 16.17,16.71 12.69,18.57 8.92,19.71 5,20.1 -18.9,20.1 -18.9,1874.9 1948.9,1874.9
+3.3V on 3.3V_Layer (split plane): 1948.9,15.1 18.13,15.1 16.17,16.71 12.69,18.57 8.92,19.71 5,20.1 -18.9,20.1 -18.9,1874.9 1948.9,1874.9

## Keep-outs
Keep-Out Layer:
  lines w32: 5,-5 1969,-5 1969,1895 -39,1895 -39,0 5,0

## Silkscreen, mask and mechanical layers (free items; w line width, h text height)
Top Overlay:
  text "GND" at 274,1824.34 h39.37
  text "Micro-Beginners" at 1680,1816.93 h39.37
  text "Lohit Prakash" at 1703,1756.34 h39.37
  text "PB09" at 1869,1606.32 h39.37
  text "5V" at 281,1580.34 h39.37
  text "PB15" at 1868.7,1506.39 h39.37
  text "BOOT0" at 978.66,1469 h39.37 r90
  text "SWCLK" at 1168.66,1469 h39.37 r90
  text "SWDIO" at 1217.66,1469 h39.37 r90
  text "PB14" at 1868.57,1406.84 h39.37
  text "PA15" at -2,1396.39 h39.37
  text "GND" at 925.66,1308 h39.37 r90
  text "GND" at 1114.66,1308 h39.37 r90
  text "PB06" at 1868.62,1306.32 h39.37
  text "3.3V" at 1030.66,1304.33 h39.37 r90
  text "3.3V" at 1268.66,1304.33 h39.37 r90
  text "PA13" at -1.7,1296.32 h39.37
  text "PB05" at 1868.7,1206.32 h39.37
  text "PA12" at -1.79,1196.14 h39.37
  text "PB04" at 1868.57,1106.32 h39.37
  text "PA11" at -1.85,1096.22 h39.37
  text "PB03" at 1869,1006.32 h39.37
  text "PA09" at -1.7,996.32 h39.37
  text "PB15" at 1868.7,906.39 h39.37
  text "PA08" at -2.06,896.32 h39.37
  text "PB14" at 1868.57,806.14 h39.37
  text "PA00" at -2,796.32 h39.37
  text "PB13" at 1869,706.32 h39.37
  text "PA01" at -1.85,696.32 h39.37
  text "PB12" at 1868.91,606.14 h39.37
  text "PA02" at -1.79,596.32 h39.37
  text "PB11" at 1868.85,506.22 h39.37
  text "PA03" at -1.7,496.32 h39.37
  text "Curiosity is Everything !" at 1223.37,484.04 h39.37 r314.54
  text "PB10" at 1868.7,406.32 h39.37
  text "PA04" at -2.14,396.32 h39.37
  text "PB02" at 1868.91,306.32 h39.37
  text "PA05" at -2,296.32 h39.37
  text "PB01" at 1868.85,206.32 h39.37
  text "PA06" at -2.09,196.32 h39.37
  text "PB00" at 1868.7,106.32 h39.37
  text "PA07" at -1.78,96.32 h39.37